# EAGLE board NBESlab_tES_Fusion_Board (EAGLE 9.7.0)
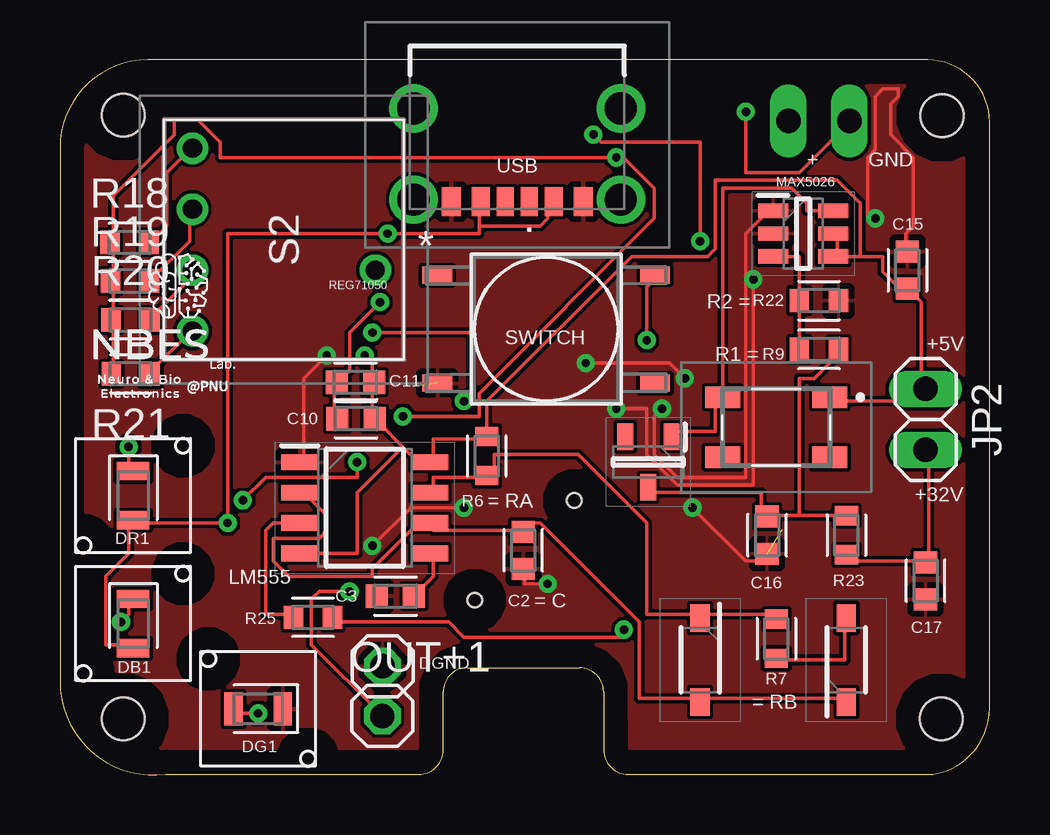
[diagram p0: board, top side]
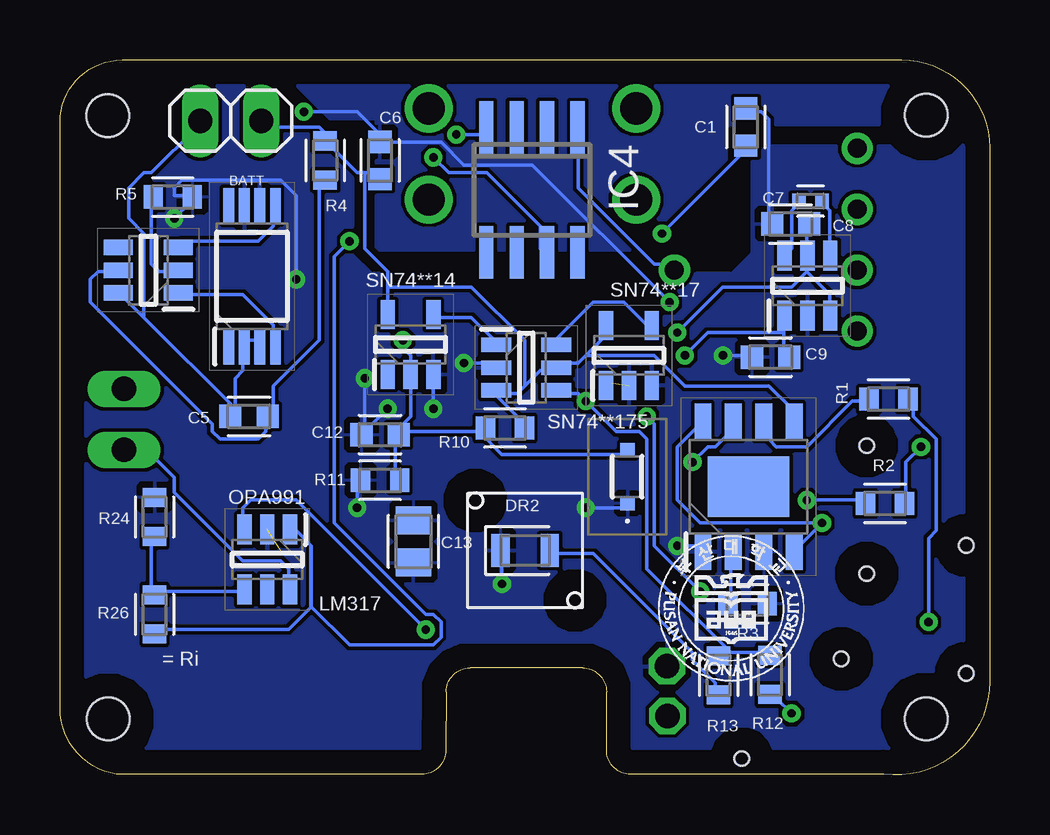
[diagram p1: board, bottom side, seen from below]

Size 38.73 x 29.81 mm. Coordinates in mm from the lower left corner, seen from the top.
Outline: 22.65,3.46 22.66,1.03 arc90 23.66,0.03 36.38,0.03 arc81 38.73,2.78 38.73,27.22 arc90 36.15,29.81 3.66,29.81 arc90 0,26.15 0,3.89 arc98 4.4,0.03 14.96,0.03 arc90 15.96,1.03 15.96,3.46 arc-90 16.96,4.46 21.65,4.46 arc-90 22.65,3.46
Copper layers (1*16): Top / Bottom
Stack-up Default Layer Stack: Top CuFoil:007 0.035mm / Dielectric-1 Core:090 1.57mm / Bottom CuFoil:007 0.035mm
Design rules: minimum copper width 6mil, minimum drill size 0.35mm, copper clearance wire_polygon to wire_polygon 6mil, copper clearance wire_polygon to pad_smd 6mil, copper clearance wire_polygon to via 6mil, copper clearance pad_smd to pad_smd 6mil, copper clearance pad_smd to via 6mil, copper clearance via to via 6mil, copper clearance smd to pad (same net) 6mil, copper clearance smd to via (same net) 6mil, copper clearance smd to smd (same net) 6mil, dimension clearance 40mil, via restrict clearance 0mil, restrict clearance 0mil, drill distance 6mil, keepout clearance 0mil
Holes 1.78 mm at 36.72,2.34 36.75,27.48 2.64,27.51 2.64,2.35

## Footprints (pad centres in the part's own frame; a part is rotated, then mirrored left to right if it is on the bottom)
1X02 = drill 1.016 long: 1 -1.27,0; 2 1.27,0
CAPC1608X85 = smd 0.921 x 0.97: 1 -0.775,0; 2 0.775,0
CAPC1005X60 = smd 0.56 x 0.629: 1 -0.485,0; 2 0.485,0
CAPC2012X110 = smd 1.165 x 1.465: 1 -0.875,0; 2 0.875,0
SOD3716X135N = smd 1.15 x 0.8: 1 -1.75,0; 2 1.75,0
PMEG1030EJ115 = smd 0.6 x 0.6: 1 -1.1,0; 2 1.1,0
SOT96P240X110-3N = smd 1.1 x 0.65: 1 -1.05,0.96; 2 -1.05,-0.96; 3 1.05,0
LEDC2012X110N_FLAT-B = smd 0.762 x 1.362: A 1.025,0; C -1.025,0 | hole 0.6: -2.078,2.078; 2.078,-2.078
1X01 = drill 1.016 octagon: 1 0,0
DLW43SH110XK2K = smd 1.45 x 0.9: 1 2.225,1.25; 2 -2.225,1.25; 3 -2.225,-1.25; 4 2.225,-1.25
SOIC127P600X175-9N = smd 1.525 x 0.7: 1 -2.712,1.905; 2 -2.712,0.635; 3 -2.712,-0.635; 4 -2.712,-1.905; 5 2.712,-1.905; 6 2.712,-0.635; 7 2.712,0.635; 8 2.712,1.905 | smd 2.513 x 3.402: 9 0,0
SOT95P280X135-6N = smd 1.2 x 0.65: 1 -1.25,0.95; 2 -1.25,0; 3 -1.25,-0.95; 4 1.25,-0.95; 5 1.25,0; 6 1.25,0.95
SOIC127P600X175-8N = smd 1.528 x 0.65: 1 -2.711,1.905; 2 -2.711,0.635; 3 -2.711,-0.635; 4 -2.711,-1.905; 5 2.711,-1.905; 6 2.711,-0.635; 7 2.711,0.635; 8 2.711,1.905
SO-08 = smd 0.6 x 2.2: 1 -1.905,-2.6; 2 -0.635,-2.6; 3 0.635,-2.6; 4 1.905,-2.6; 5 1.905,2.6; 6 0.635,2.6; 7 -0.635,2.6; 8 -1.905,2.6
SOT95P280X110-6N = smd 1.25 x 0.6: 1 -1.25,0.95; 2 -1.25,0; 3 -1.25,-0.95; 4 1.25,-0.95; 5 1.25,0; 6 1.25,0.95
SOT95P280X145-5N = smd 1.2 x 0.6: 1 -1.25,0.95; 2 -1.25,0; 3 -1.25,-0.95; 4 1.25,-0.95; 5 1.25,0.95
SOT95P280X145-6N = smd 1.25 x 0.6: 1 -1.25,0.95; 2 -1.25,0; 3 -1.25,-0.95; 4 1.25,-0.95; 5 1.25,0; 6 1.25,0.95
SOP65P640X120-8N = smd 1.475 x 0.45: 1 -2.938,0.975; 2 -2.938,0.325; 3 -2.938,-0.325; 4 -2.938,-0.975; 5 2.938,-0.975; 6 2.938,-0.325; 7 2.938,0.325; 8 2.938,0.975
RESC1608X60 = smd 0.799 x 0.974: 1 -0.815,0; 2 0.815,0
S2150 = drill 0.8 pad 1.3: 1 0,0; 2 -2.54,0; 4 -5.08,0; 8 -7.62,0; C1 -2.54,7.62
SWITCH_1571563-9-L = smd 1.245 x 0.711: 1 -4.534,2.248; 2 -4.534,-2.248; 3 4.534,-2.248; 4 4.534,2.248
USB4125GFA0190 = smd 0.7 x 1.2: A5 -0.5,3.08; B5 0.5,3.08 | smd 0.76 x 1.2: A9 1.52,3.08; B9 -1.52,3.08 | smd 0.8 x 1.2: A12 2.75,3.08; B12 -2.75,3.08 | drill 1.34 pad 2.01: MH1 -4.32,3; MH2 -4.32,-0.8; MH3 4.32,-0.8; MH4 4.32,3

## Placement (x,y rotation side)
BATT  PLATED-HOLE-1X2  [1X02]  31.62,27.27 180 bottom
C1  [CAPC1608X85]  10.16,27.01 90 bottom
C2  [CAPC1608X85]  19.3,9.36 270 top
C3  [CAPC1608X85]  13.97,7.46 180 top
C5  [CAPC1608X85]  30.86,14.95 180 bottom
C6  [CAPC1608X85]  25.4,25.62 90 bottom
C7  [CAPC1005X60]  7.47,23.92 0 bottom
C8  [CAPC1608X85]  8.29,22.97 180 bottom
C9  [CAPC1608X85]  9.13,17.42 180 bottom
C10  [CAPC1608X85]  12.33,14.86 180 top
C11  [CAPC1608X85]  12.31,16.37 180 top
C12  [CAPC1608X85]  25.4,14.19 180 bottom
C13  [CAPC2012X110]  24,9.73 270 bottom
C15  [CAPC1608X85]  35.31,21.05 90 top
C16  [CAPC1608X85]  29.46,10 270 top
C17  [CAPC1608X85]  36.07,8.09 270 top
D1  MMSD4148  [SOD3716X135N]  26.67,4.79 270 top
D2  MMSD4148  [SOD3716X135N]  32.77,4.79 90 top
D3  PMEG1030EJ,115  [PMEG1030EJ115]  15.09,12.43 90 bottom
D4  ZHCS500TA  [SOT96P240X110-3N]  24.51,13.04 270 top
DB1  LED_BLUE  [LEDC2012X110N_FLAT-B]  3.05,6.31 270 top
DG1  LED_BLUE  [LEDC2012X110N_FLAT-B]  8.26,2.76 180 top
DGND  PINHD-1X1  [1X01]  13.44,4.53 180 top
DR1  LED_BLUE  [LEDC2012X110N_FLAT-B]  3.05,11.65 270 top
DR2  LED_BLUE  [LEDC2012X110N_FLAT-B]  19.35,9.36 0 bottom
FL1  DLW43SH510XK2L  [DLW43SH110XK2K]  29.84,14.49 0 top
IC1  TP4056X  [SOIC127P600X175-9N]  10.04,12.02 90 bottom
IC2  DW01A-G  [SOT95P280X135-6N]  35.05,21.05 180 bottom
IC3  LM555  [SOIC127P600X175-8N]  12.7,11.14 0 top
IC4  LM334  [SO-08]  19.07,24.39 180 bottom
IC5  REG71050  [SOT95P280X110-6N]  7.59,20.4 90 bottom
IC6  SN74*17  [SOT95P280X145-5N]  15.03,17.49 90 bottom
IC7  SN74*14  [SOT95P280X145-5N]  24.13,17.94 90 bottom
IC8  SN74*175  [SOT95P280X145-6N]  19.3,16.98 0 bottom
IC11  MAX5026EUT+T  [SOT95P280X145-6N]  30.96,22.57 0 top
JP2  PINHD-1X2  [1X02]  36.07,14.82 270 top
OPA991  OPA991  [SOT95P280X145-6N]  30.1,8.98 270 bottom
OUT+1  PINHD-1X1  [1X01]  13.43,2.46 0 top
Q1  FS8205A  [SOP65P640X120-8N]  30.73,20.79 90 bottom
R1  [RESC1608X60]  4.21,15.67 0 bottom
R2  [RESC1608X60]  4.36,11.32 0 bottom
R3  [RESC1608X60]  10.09,7.14 180 bottom
R4  [RESC1608X60]  27.69,25.62 90 bottom
R5  [RESC1608X60]  34.04,24.09 180 bottom
R6  [RESC1608X60]  17.78,13.3 90 top
R7  [RESC1608X60]  29.84,5.68 90 top
R9  [RESC1608X60]  31.62,17.74 0 top
R10  [RESC1608X60]  20.19,14.46 0 bottom
R11  [RESC1608X60]  25.4,12.28 0 bottom
R12  [RESC1608X60]  9.15,4.17 90 bottom
R13  [RESC1608X60]  11.3,4.15 90 bottom
R18  [RESC1608X60]  2.9,22.2 0 top
R19  [RESC1608X60]  2.92,20.6 0 top
R20  [RESC1608X60]  2.94,18.97 0 top
R21  [RESC1608X60]  2.95,16.72 180 top
R22  [RESC1608X60]  31.62,19.78 180 top
R23  [RESC1608X60]  32.77,10 90 top
R24  [RESC1608X60]  34.8,10.76 90 bottom
R25  [RESC1608X60]  10.54,6.57 0 top
R26  [RESC1608X60]  34.8,6.69 90 bottom
S2  S-2150  [S2150]  5.52,18.51 270 top
U1  SWITCH  [SWITCH_1571563-9-L]  20.26,18.58 0 top
USB  USB4125-GF-A-0190  [USB4125GFA0190]  19.05,26.99 180 top

## Library data of the parts
BATT = tDCS Library; CATEGORY: CONNECTOR; SUB-CATEGORY: PIN-HEADER
C1-C3 C5-C12 C15-C17 = Capacitor; CATEGORY: Capacitor
C13 = Capacitor; CATEGORY: Capacitor; PACKAGE_SIZE: 0805; PACKAGE_TYPE: Surface Mount; SUBCATEGORY: Ceramic Capacitors; TYPE: MLCC
D1 D2 = tDCS Library; ARROW_PART_NUMBER: MMSD4148T3G; ARROW_PRICE-STOCK: https://www.arrow.com/en/products/mmsd4148t3g/on-semiconductor?region=nac; HEIGHT: 1.35mm; MANUFACTURER_NAME: onsemi; MANUFACTURER_PART_NUMBER: MMSD4148T3G; MOUSER_PART_NUMBER: 863-MMSD4148T3G; MOUSER_PRICE-STOCK: https://www.mouser.co.uk/ProductDetail/onsemi/MMSD4148T3G?qs=P4IOph%252Bbot9it%2F8cCSipaQ%3D%3D
D3 = tDCS Library; ARROW_PART_NUMBER: PMEG1030EJ,115; ARROW_PRICE-STOCK: https://www.arrow.com/en/products/pmeg1030ej115/nexperia?region=asia; DESCRIPTION: Schottky Diodes & Rectifiers SCHOTTKY 10V 3A; HEIGHT: 0.8mm; MANUFACTURER_NAME: Nexperia; MANUFACTURER_PART_NUMBER: PMEG1030EJ,115; MOUSER_PART_NUMBER: 771-PMEG1030EJ-T/R; MOUSER_PRICE-STOCK: https://www.mouser.co.uk/ProductDetail/Nexperia/PMEG1030EJ115?qs=LOCUfHb8d9vmk7P%2FuYbs5A%3D%3D
D4 = tDCS Library; DESCRIPTION: Schottky Diodes & Rectifiers VR=40V IF=500mA IR=40uA; HEIGHT: 1.1mm; MANUFACTURER_NAME: Diodes Inc.; MANUFACTURER_PART_NUMBER: ZHCS500TA; MOUSER_PART_NUMBER: 522-ZHCS500TA; MOUSER_PRICE-STOCK: https://www.mouser.co.uk/ProductDetail/Diodes-Incorporated/ZHCS500TA?qs=%2F4dsY8i%2FUxLCpXiE%252BQsu9g%3D%3D
DB1 DG1 DR1 DR2 = tDCS Library; CATEGORY: LED; COLOR: BLUE; DESCRIPTION: CHIP LED FLAT; SUB-CATEGORY: CHIP; TYPE: FLAT_TOP
DGND OUT+1 = Connector; CATEGORY: Headers; DESCRIPTION: Header, Straight, 1 Position; MANUFACTURER: Generic; MPN: Generic; OPERATING_TEMPERATURE: Generic; PART_STATUS: Active; PITCH: 0.100" (2.54mm); ROHS_COMPLIANCE: Generic; SERIES: Generic; SUB-CATEGORY: Headers, Male Pins; TYPE: Board to Board or Cable, Unshrouded, Through Hole, Straight
FL1 = tDCS Library; DESCRIPTION: 1812 SMD Common Mode Choke 230mA 51uH DLW43S Common Mode Choke, -40 +125 C, 4.5 x 3.2 x 2.6mm; HEIGHT: 2.8mm; MANUFACTURER_NAME: Murata Electronics; MANUFACTURER_PART_NUMBER: DLW43SH510XK2L; MOUSER_PART_NUMBER: 81-DLW43SH510XK2L; MOUSER_PRICE-STOCK: https://www.mouser.co.uk/ProductDetail/Murata-Electronics/DLW43SH510XK2L?qs=%2F%252BYoplLUB5gqIXi5PiNF7A%3D%3D
IC1 = tDCS Library; DESCRIPTION: PMIC - Battery Management SOP-8_EP_150mil RoHS; HEIGHT: 1.75mm; MANUFACTURER_NAME: Nanjing Extension Microelectronics; MANUFACTURER_PART_NUMBER: TP4056X
IC2 = tDCS Library; DESCRIPTION: One Cell Lithium-ion/Polymer Battery Protection IC; HEIGHT: 1.35mm; MANUFACTURER_NAME: Fortune Semiconductor Corporation; MANUFACTURER_PART_NUMBER: DW01A-G
IC3 = tDCS Library; DESCRIPTION: Highly stable 555 timer for generating accurate time delays and oscillation; HEIGHT: 1.75mm; MANUFACTURER_NAME: Texas Instruments; MANUFACTURER_PART_NUMBER: LM555CM/NOPB; MOUSER_PART_NUMBER: 926-LM555CM/NOPB; MOUSER_PRICE-STOCK: https://www.mouser.co.uk/ProductDetail/Texas-Instruments/LM555CM-NOPB?qs=QbsRYf82W3Hc3mLUToU1xw%3D%3D
IC4 = texas; MF: TEXAS INSTRUMENTS; MPN: BQ2002TSN; OC_FARNELL: 1564910; OC_NEWARK: 74C7527
IC5 = tDCS Library; ARROW_PART_NUMBER: REG71050DDCR; ARROW_PRICE-STOCK: https://www.arrow.com/en/products/reg71050ddcr/texas-instruments; DESCRIPTION: 60-mA, 5.0-V, Buck/Boost Charge Pump in ThinSOT-23; HEIGHT: 1.1mm; MANUFACTURER_NAME: Texas Instruments; MANUFACTURER_PART_NUMBER: REG71050DDCR; MOUSER_PART_NUMBER: 595-REG71050DDCR; MOUSER_PRICE-STOCK: https://www.mouser.co.uk/ProductDetail/Texas-Instruments/REG71050DDCR?qs=sSOk4GDDv7w%2FF3O8izAevQ%3D%3D
IC6 = tDCS Library; DESCRIPTION: SINGLE SCHMITT-TRIGGER BUFFER; HEIGHT: 1.45mm; MANUFACTURER_NAME: Texas Instruments; MANUFACTURER_PART_NUMBER: SN74LVC1G17DBVR; MOUSER_PART_NUMBER: 595-SN74LVC1G17DBVR; MOUSER_PRICE-STOCK: https://www.mouser.co.uk/ProductDetail/Texas-Instruments/SN74LVC1G17DBVR?qs=fvkeCqCHl3BQIcdbAa1fbQ%3D%3D
IC7 = tDCS Library; DESCRIPTION: TEXAS INSTRUMENTS - SN74LVC1G14DBVR - IC, SCHMITT TRIGGER INVERTER, SMD; HEIGHT: 1.45mm; MANUFACTURER_NAME: Texas Instruments; MANUFACTURER_PART_NUMBER: SN74LVC1G14DBVR; MOUSER_PART_NUMBER: 595-SN74LVC1G14DBVR; MOUSER_PRICE-STOCK: https://www.mouser.co.uk/ProductDetail/Texas-Instruments/SN74LVC1G14DBVR?qs=dT9u2OTAaVWRIgCrQFnxuQ%3D%3D
IC8 OPA991 = tDCS Library
IC11 = tDCS Library; DESCRIPTION: Maxim MAX5026EUT+T, Step Up DC-DC Converter, Adjustable, 4 36 V, 6-Pin SOT-23; HEIGHT: 1.45mm; MANUFACTURER_NAME: Maxim Integrated; MANUFACTURER_PART_NUMBER: MAX5026EUT+T; MOUSER_PART_NUMBER: 700-MAX5026EUTT; MOUSER_PRICE-STOCK: https://www.mouser.co.uk/ProductDetail/Maxim-Integrated/MAX5026EUT%2bT?qs=Mqkh4jHMT8zfiFUMsw6rrA%3D%3D
JP2 = Connector; CATEGORY: Connectors; DESCRIPTION: Header-Straight-2 Position; PACKAGE_TYPE: Through Hole; PITCH: 0.100" (2.54mm); SUBCATEGORY: Headers; TYPE: Male Pins
Q1 = tDCS Library; DESCRIPTION: Dual N-Channel Enahncement Mode Power MOSFET; HEIGHT: 1.2mm; MANUFACTURER_NAME: fortune; MANUFACTURER_PART_NUMBER: FS8205A
R1-R7 R9-R13 R18-R26 = Resistor; CATEGORY: Resistors; DESCRIPTION: Chip Resistor 1.60 X 0.82 X 0.60 mm body 0603(1608-METRIC) Package; PACKAGE_SIZE: 0603; PACKAGE_TYPE: Surface Mount
S2 = S-2150; DESCRIPTION: Copal Electronics S-2050, 4 Position SP4T Rotary Switch, 100 mA, Solder; HEIGHT: 7mm; MANUFACTURER_NAME: Copal Electronics; MANUFACTURER_PART_NUMBER: S-2150
U1 = Switches; BUILT_BY: EMA_UL_Team; CATEGORY: Tactile Switches; COPYRIGHT: Copyright (C) 2016 Accelerated Designs. All rights reserved; DESCRIPTION: FSM8JSMATR=TACT,SMT,T&R; MANUFACTURER_PART_NUMBER: 1571563-9; PART_STATUS: active; SERIES: Alcoswitch Tactile FSM JSM; VENDOR: TE Connectivity
USB = tDCS Library; DESCRIPTION: USB Connectors USB C Rec GF RA 6P SMT TH Stakes 1.9mm; HEIGHT: 3.41mm; MANUFACTURER_NAME: GCT (GLOBAL CONNECTOR TECHNOLOGY); MANUFACTURER_PART_NUMBER: USB4125-GF-A-0190; MOUSER_PART_NUMBER: 640-USB4125-GF-A-190; MOUSER_PRICE-STOCK: https://www.mouser.co.uk/ProductDetail/GCT/USB4125-GF-A-0190?qs=QNEnbhJQKvbCz4hEJBS24w%3D%3D

## Nets
5V_USB: C1.1 DB1.A DR1.A IC1.4 IC1.8 USB.A9 USB.B9
+5V: C9.1 C10.1 C11.1 C15.1 FL1.1 IC3.4 IC3.8 IC5.1 IC11.4 IC11.5 JP2.1 R6.2
+5V_PULSE: IC3.3 R25.1
+32V: C17.1 JP2.2 OPA991.6 R23.1
+B3.7V: C8.1 IC5.3 IC5.5 IC8.4 R12.2 R13.2
BGND: BATT.2 C5.2 C6.2 C10.2 C11.2 IC2.6 Q1.2 Q1.3
BIN: BATT.1 C6.1 IC1.5 IC6.5 IC7.5 IC8.3 IC8.5 R4.2 R10.2
DGND: C1.2 C2.2 C3.2 C8.2 C9.2 C12.2 C13.1 C13.2 C15.2 C16.2 C17.2 D3.1 DG1.C DGND.1 DR2.C IC1.1 IC1.3 IC3.1 IC5.2 IC6.2 IC6.3 IC7.3 IC8.2 IC11.1 IC11.2 OPA991.2 Q1.6 Q1.7 R3.1 R5.1 R11.1 R22.1 R24.2 U1.2 USB.A12 USB.B12
N$1: C2.1 D1.2 D2.1 IC3.2 IC3.6
N$2: D1.1 IC3.7 R6.1 R7.2
N$3: C3.1 IC3.5
N$4: D2.2 R7.1
N$5: D4.1 FL1.2 IC11.6
N$6: IC4.1 S2.C1
N$8: IC1.7 R2.1
N$9: IC1.6 R1.1
N$10: DB1.C R1.2
N$11: DR1.C R2.2
N$12: C12.1 D3.2 IC7.2 R10.1 R11.2 U1.4
N$13: C7.2 IC5.4
N$14: IC2.3 Q1.5
N$15: IC2.1 Q1.4
N$16: IC2.2 R5.2
N$17: C7.1 IC5.6
N$18: C16.1 D4.3 R9.2 R23.2
N$19: C5.1 IC2.5 R4.1
N$21: IC6.4 IC8.6
N$22: IC7.4 IC8.1
N$23: DG1.A R12.1
N$24: DR2.A R13.1
N$25: IC1.2 R3.2
N$30: R18.2 S2.8
N$31: IC11.3 R9.1 R22.2
N$32: OPA991.3 R25.2
N$33: OPA991.4 R24.1 R26.2
N$34: R19.2 S2.4
N$35: R20.2 S2.2
N$37: R21.1 S2.1
OUT+1: IC4.7 OUT+1.1 R18.1 R19.1 R20.1 R21.2
PULSE_AMPLIFIED: IC4.4 OPA991.1 R26.1

## Tracks (layer width: path | path; a pad name or v marks a point on that pad's centre or on a via)
5V_USB  (via drill 0.35)
  Top 0.152: 17.46,22.89 17.46,23.84 USB.A9 | 17.46,22.89 17.46,22.57 v13.65,22.57 6.99,22.57 v6.99,10.5 3.17,10.5 DR1.A 2.86,10.5 2.86,9.23 1.91,8.28 1.91,5.42 2.86,5.42 DB1.A | 17.46,22.89 20,22.89 20.32,23.2 20.32,23.84 USB.B9
  Bottom 0.152: v13.65,22.57 10.16,26.06 C1.1 | IC1.4 7.94,9.55 v6.99,10.5 12.06,10.5 13.02,11.46 13.02,13.68 12.06,14.63 IC1.8
+5V  (via drill 0.35)
  Top 0.152: 32.38,21.62 32.38,22.57 IC11.5 | FL1.1 32.38,15.58 35.88,15.58 35.88,15.9 JP2.1 35.88,16.22 35.88,19.71 35.56,20.03 C15.1 35.24,20.03 34.29,20.98 34.29,21.62 33.34,21.62 | 33.34,21.62 32.38,21.62 | 32.38,21.62 IC11.4 | 14.29,13.68 14.92,13.04 IC3.8 15.56,13.04 15.56,14 17.78,14 R6.2 17.78,15.58 23.81,21.62 26.99,21.62 27.3,21.93 27.3,24.79 32.38,24.79 33.34,23.84 33.34,21.62 | 14.29,13.68 13.34,14.63 C10.1 13.02,14.95 13.02,16.22 C11.1 13.02,16.54 13.02,17.17 v12.7,17.49 | IC3.4 12.38,9.23 12.38,11.77 14.29,13.68
  Bottom 0.152: 8.57,18.44 8.57,19.08 IC5.1 | 8.57,18.44 8.57,17.49 C9.1 | 8.57,18.44 11.75,18.44 v12.7,17.49
+5V_PULSE
  Top 0.152: IC3.3 8.89,10.5 8.57,10.19 8.57,6.69 9.53,6.69 R25.1
+32V
  Top 0.152: R23.1 33.02,8.92 35.88,8.92 C17.1 36.2,8.92 36.2,13.36 JP2.2
  Bottom 0.152: OPA991.6 29.21,7.96 29.21,8.6 29.53,8.92 31.11,8.92 33.97,11.77 33.97,12.41 34.92,13.36 35.88,13.36 JP2.2
+B3.7V  (via drill 0.35)
  Top 0.152: v13.02,18.44 17.14,18.44 17.14,15.9 v16.83,15.58
  Bottom 0.152: C8.1 7.62,22.89 7.62,21.93 IC5.5 7.62,21.62 7.62,20.98 | 7.62,20.98 6.67,20.03 6.67,19.39 IC5.3 | 10.79,5.11 11.11,5.11 R13.2 | 10.79,5.11 9.21,5.11 R12.2 | 10.79,5.11 14.29,8.6 14.29,14 14.61,14.31 15.56,14.31 v16.83,15.58 17.14,15.9 17.78,15.9 IC8.4 | 7.62,20.98 8.26,20.35 11.11,20.35 v13.02,18.44
BGND  (via drill 0.35)
  Top 0.152: C10.2 11.43,14.95 11.43,16.22 C11.2 11.75,16.54 12.06,16.85 12.06,18.44 v13.34,19.71 | v28.57,27.65 28.57,25.11 30.8,25.11 32.7,27.01 BATT.2
  Bottom 0.152: 31.43,15.27 31.43,16.54 31.11,16.85 31.11,17.81 Q1.2 31.11,18.12 30.48,18.12 Q1.3 | 31.43,15.27 31.43,14.95 C5.2 31.43,15.27 | 31.43,15.27 35.24,19.08 | 35.24,19.08 36.2,20.03 IC2.6 | 35.24,19.08 35.24,22.57 35.88,23.2 35.88,24.47 35.24,25.11 34.92,25.11 33.02,27.01 BATT.2 | v13.34,19.71 19.05,25.43 21.91,25.43 22.86,26.38 C6.2 25.4,26.7 26.35,27.65 v28.57,27.65
  pour Bottom: 4.64,31.35 28.93,31.35 29.22,31.64 29.22,29 27.52,27.3 25.64,27.3 25.62,27.28 25.62,22.01 25.43,21.82 11.03,21.82 10.9,21.95 10.9,26.99 10.85,27.04 3.81,27.04 3.57,27.28 3.57,31.2 3.76,31.38
BIN
  Bottom 0.152: 26.04,25.11 26.35,25.11 27.62,26.38 R4.2 27.62,26.7 27.94,27.01 30.16,27.01 BATT.1 | 26.04,25.11 25.4,25.11 C6.1 | 25.08,20.35 25.08,20.98 26.04,21.93 26.04,25.11 | 25.08,20.35 25.08,19.39 IC7.5 | R10.2 19.68,14.63 19.68,14.95 20.64,15.9 IC8.3 20.32,15.9 19.68,15.9 19.37,16.22 | 16.83,17.49 17.14,17.17 17.78,17.17 IC8.5 18.1,16.85 18.73,16.85 19.37,16.22 | 16.83,17.49 16.19,18.12 16.19,18.44 IC6.5 | 16.83,17.49 13.97,17.49 12.7,16.22 9.21,16.22 8.26,15.27 8.26,14.95 IC1.5 | 25.08,20.35 21.59,20.35 19.37,18.12 19.37,16.22
DGND  (via drill 0.35)  (2 unrouted)
  Top 0.152: v13.02,9.55 14.61,11.14 v16.83,11.14 | v20.32,7.96 19.37,7.96 19.37,8.28 C2.2 | v11.11,17.49 10.16,16.54 10.16,13.04 IC3.1 | v26.35,11.14 28.57,8.92 29.21,8.92 C16.2 | v25.08,15.27 24.77,14.95 24.77,13.36 25.72,12.41 28.57,12.41 28.57,22.57 29.53,23.52 IC11.1 | v26.04,16.54 25.4,17.17 v21.91,17.17 | v23.18,15.27 24.45,15.27 24.45,13.36 25.72,12.09 28.89,12.09 v28.89,20.66 | v33.97,23.2 33.66,23.2 33.66,25.74 33.97,26.06 33.97,28.28 34.29,28.6 34.92,28.6 34.92,28.28 34.61,27.97 34.61,26.7 35.56,25.74 35.56,22.89 35.24,22.57 35.24,21.93 C15.2
  Bottom 0.152: C1.2 10.16,27.65 9.53,27.65 9.21,27.33 9.21,23.2 C8.2 | v13.02,9.55 12.06,9.55 IC1.1 | v16.83,11.14 15.24,11.14 D3.1 | v20.32,7.96 20.32,9.23 DR2.C | v11.11,17.49 10.16,17.49 C9.2 | v26.35,11.14 26.35,12.09 R11.1 | v25.08,15.27 26.04,14.31 | v26.04,16.54 26.04,14.31 | v21.91,17.17 20.64,17.17 IC8.2 | 26.04,14.31 C12.2 | v23.18,15.27 23.18,16.54 IC7.3 | v28.89,20.66 28.89,24.16 29.53,24.79 33.66,24.79 33.97,24.47 33.97,24.16 33.34,24.16 R5.1 33.34,23.84 v33.97,23.2
  pour Top: -0.77,31.93 39.89,31.93 39.89,-1.36 -0.86,-1.36 -0.86,3.1 -0.81,3.1
  pour Bottom: 1.78,31.52 1.78,27.6 3.1,26.29 9.3,26.29 9.95,25.63 9.95,21.77 10.77,20.96 25.73,20.96 26.48,21.71 26.48,26 26.83,26.35 27.86,26.35 30.14,28.63 30.14,31.67 38.6,31.67 40.22,30.04 40.22,0.55 38.04,-1.64 1.56,-1.64 -1.95,1.87 -1.95,29.67 -0.13,31.49
N$1
  Top 0.152: 26.67,3.2 32.7,3.2 D2.1 | IC3.2 10.16,11.77 11.11,10.82 11.11,10.19 10.79,9.87 8.89,9.87 8.89,8.92 9.53,8.28 13.02,8.28 13.02,8.6 14.92,10.5 IC3.6 15.56,10.5 15.56,10.19 19.05,10.19 C2.1 19.37,10.19 19.37,10.5 20,10.5 24.13,6.38 24.13,3.2 26.67,3.2 | 26.67,3.2 D1.2
N$2
  Top 0.152: 26.67,6.69 29.84,6.69 R7.2 | 17.78,12.41 15.56,12.41 15.56,11.77 IC3.7 | 26.67,6.69 24.45,6.69 24.45,10.5 21.59,13.36 18.1,13.36 18.1,12.73 17.78,12.41 | 26.67,6.69 D1.1 | 17.78,12.41 R6.1
N$3
  Top 0.152: C3.1 14.92,7.65 15.56,8.28 15.56,9.23 IC3.5
N$4
  Top 0.152: R7.1 29.84,4.79 32.7,4.79 32.7,6.38 D2.2
N$5
  Top 0.152: D4.1 25.72,14.31 27.3,14.31 27.3,15.58 FL1.2 27.62,15.9 27.62,24.47 30.48,24.47 31.11,23.84 31.11,23.52 32.07,23.52 IC11.6
N$6
  Bottom 0.152: IC4.1 17.14,26.7 17.14,24.47 13.97,21.3 13.34,21.3 S2.C1
N$8  (via drill 0.35)
  Top 0.152: v7.62,11.46 8.57,12.41 12.38,12.41 v12.38,13.04
  Bottom 0.152: v7.62,11.46 5.4,11.46 R2.1 | v12.38,13.04 11.75,13.68 11.43,13.68 10.48,14.63 IC1.7
N$9
  Bottom 0.152: R1.1 5.08,15.58 5.71,15.58 7.62,13.68 8.89,13.68 9.21,14 9.21,14.63 IC1.6
N$10  (via drill 0.35)
  Top 0.152: v2.54,6.38 2.86,6.69 2.86,7.33 DB1.C
  Bottom 0.152: v2.54,6.38 2.54,9.87 2.22,10.19 2.22,14 3.17,14.95 3.17,15.58 R1.2
N$11  (via drill 0.35)
  Top 0.152: v2.86,13.68 2.86,12.73 DR1.C
  Bottom 0.152: v2.86,13.68 3.49,13.04 3.49,11.46 R2.2
N$12  (via drill 0.35)
  Top 0.152: v24.45,18.12 24.45,20.35 24.77,20.66 U1.4
  Bottom 0.152: 21.27,14.31 20.32,13.36 15.24,13.36 D3.2 | C12.1 24.77,14 24.77,12.41 R11.2 | C12.1 24.77,14.31 24.13,14.95 IC7.2 24.13,17.49 24.45,17.81 v24.45,18.12 | 21.27,14.31 24.45,14.31 C12.1 | 21.27,14.31 R10.1
N$13
  Bottom 0.152: C7.2 6.99,23.84 6.67,23.52 6.67,21.93 IC5.4
N$14
  Bottom 0.152: IC2.3 33.66,22.25 30.48,22.25 29.84,22.89 29.84,23.52 Q1.5
N$15
  Bottom 0.152: IC2.1 33.66,20.03 31.11,20.03 29.84,18.76 29.84,18.12 Q1.4
N$16
  Bottom 0.152: R5.2 34.92,23.84 34.92,21.3 34.61,20.98 33.97,20.98 IC2.2
N$17
  Bottom 0.152: C7.1 7.94,23.84 8.26,23.52 8.26,21.93 IC5.6
N$18
  Top 0.152: 30.8,10.82 32.7,10.82 R23.2 | 30.8,10.82 29.53,10.82 C16.1 29.21,10.82 29.21,11.77 24.77,11.77 D4.3 | 30.8,10.82 30.8,16.54 31.43,16.54 32.38,17.49 R9.2
N$19
  Bottom 0.152: R4.1 27.94,24.79 27.94,18.12 29.84,16.22 29.84,14.95 C5.1 30.16,14.95 30.16,14.31 30.48,14 32.07,14 32.38,14.31 32.38,14.63 37.47,19.71 37.47,20.66 37.15,20.98 36.51,20.98 IC2.5
N$21
  Bottom 0.152: IC6.4 14.29,18.76 15.24,19.71 16.51,19.71 18.1,18.12 IC8.6
N$22
  Bottom 0.152: IC7.4 23.18,19.08 21.59,19.08 20.64,18.12 IC8.1
N$23  (via drill 0.35)
  Top 0.152: v8.26,2.57 7.3,2.57 DG1.A
  Bottom 0.152: v8.26,2.57 8.89,3.2 R12.1
N$24
  Bottom 0.152: R13.1 11.43,3.52 11.43,3.84 12.38,4.79 12.38,5.11 16.51,9.23 18.1,9.23 DR2.A
N$25
  Bottom 0.152: R3.2 10.79,7.33 10.79,9.23 IC1.2
N$30
  Top 0.152: R18.2 3.81,22.25 4.45,22.89 4.45,25.11 5.4,26.06 S2.8
N$31
  Top 0.152: R9.1 30.8,17.81 30.8,19.71 R22.2 30.8,20.03 30.8,21.62 29.84,21.62 IC11.3
N$32  (via drill 0.35)
  Top 0.152: v23.5,6.06 23.5,5.74 16.83,5.74 16.19,6.38 11.43,6.38 R25.2
  Bottom 0.152: v23.5,6.06 28.89,11.46 30.8,11.46 31.11,11.14 31.11,10.5 OPA991.3
N$33
  Bottom 0.152: R24.1 34.92,9.87 34.92,7.65 R26.2 34.61,7.65 31.11,7.65 OPA991.4
N$34
  Top 0.152: R19.2 3.81,20.66 5.4,22.25 5.4,23.52 S2.4
N$35
  Top 0.152: R20.2 3.81,19.08 5.4,20.66 5.4,20.98 S2.2
N$37
  Top 0.152: R21.1 3.81,16.85 5.4,18.44 S2.1
OUT+1  (via drill 0.35)
  Top 0.152: R21.2 2.22,16.85 2.22,18.76 R20.1 2.22,19.08 2.22,20.35 R19.1 2.22,20.66 2.22,21.93 R18.1 2.22,22.25 2.22,24.16 4.76,26.7 4.76,27.33 5.71,27.33 6.67,26.38 6.67,25.74 v23.18,25.74 23.5,25.74 24.77,24.47 24.77,23.2 17.46,15.9 17.46,14.95 v14.29,14.95 | v12.06,7.65 10.79,7.65 10.48,7.33 10.48,5.42 13.34,2.57 OUT+1.1
  Bottom 0.152: v23.18,25.74 22.54,25.11 20.95,25.11 18.73,22.89 18.73,21.93 IC4.7 | v12.06,7.65 13.97,9.55 13.97,14.63 v14.29,14.95
PULSE_AMPLIFIED  (via drill 0.35)
  Top 0.152: v22.23,26.7 22.54,26.38 26.67,26.38 v26.67,22.25
  Bottom 0.152: 28.26,7.01 29.21,6.06 34.61,6.06 R26.1 | 28.26,7.01 28.26,9.55 28.89,10.19 OPA991.1 | v22.23,26.7 21.27,26.7 IC4.4 | v26.67,22.25 27.3,21.62 27.3,10.5 23.5,6.69 23.18,6.69 22.86,6.38 22.86,5.74 23.18,5.42 26.67,5.42 28.26,7.01

## Text on the board
tNames: MAX5026 | + GND | REG71050 | R2 = | R1 = | +5V | = RA | +32V | LM555 | = C | = RB
bNames: SN74**17 | SN74**14 | SN74**175 | LM317 | = Ri